# Altium PCB JHDriverBoard.PcbDoc
Units mm, origin at the board's own origin, x right, y up, seen from the top; angles counter-clockwise.
Board outline 96 x 90 mm, 4 copper layers (Top Layer, layer2, layer3, Bottom Layer), stack 0.603 mm thick; 36 components, 36 nets, 212 pads, 65 vias.
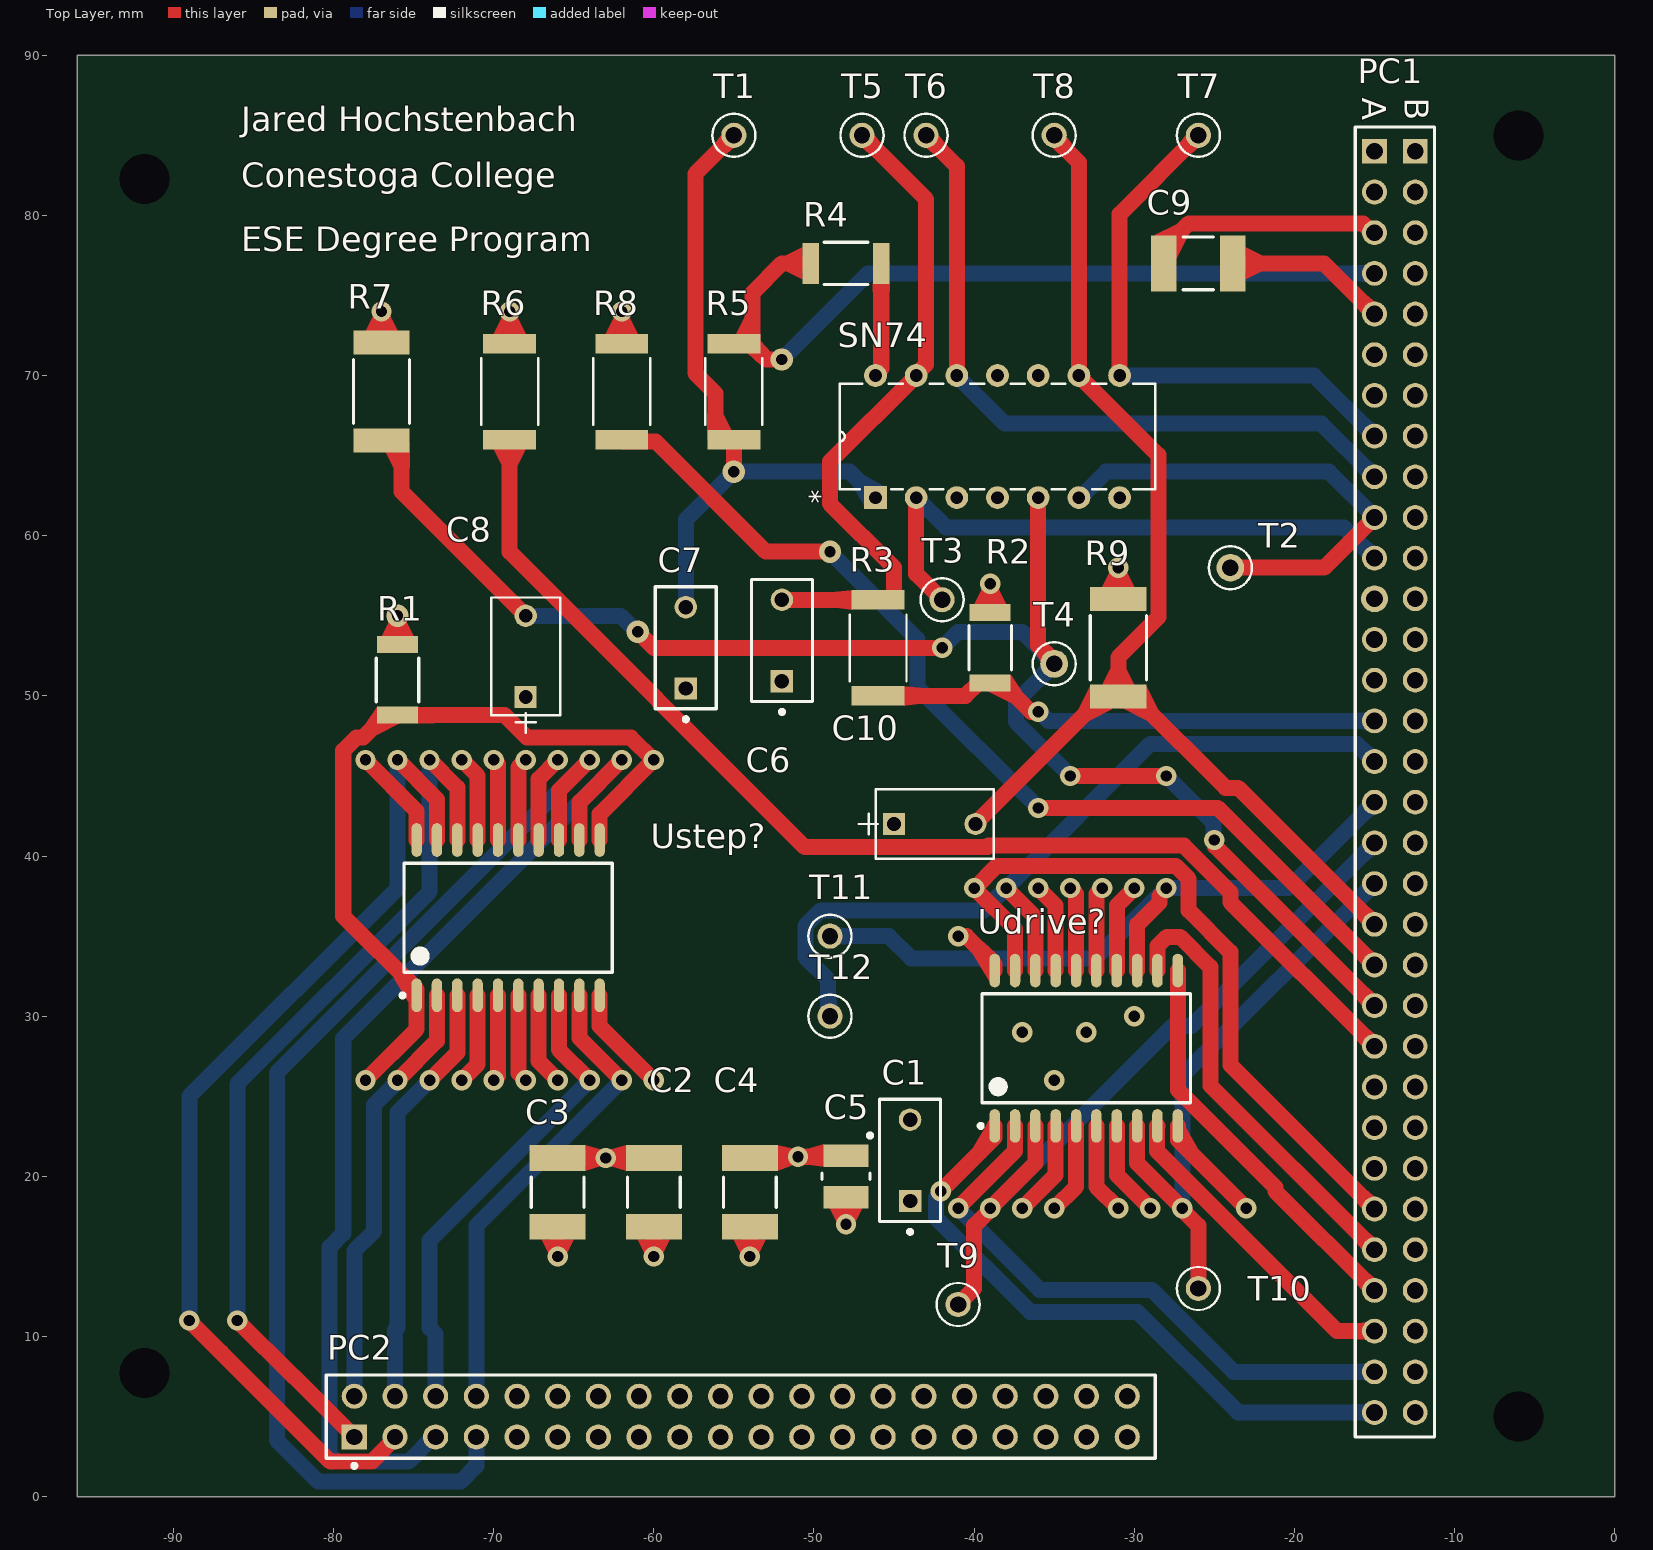
[diagram p0: Top Layer view]
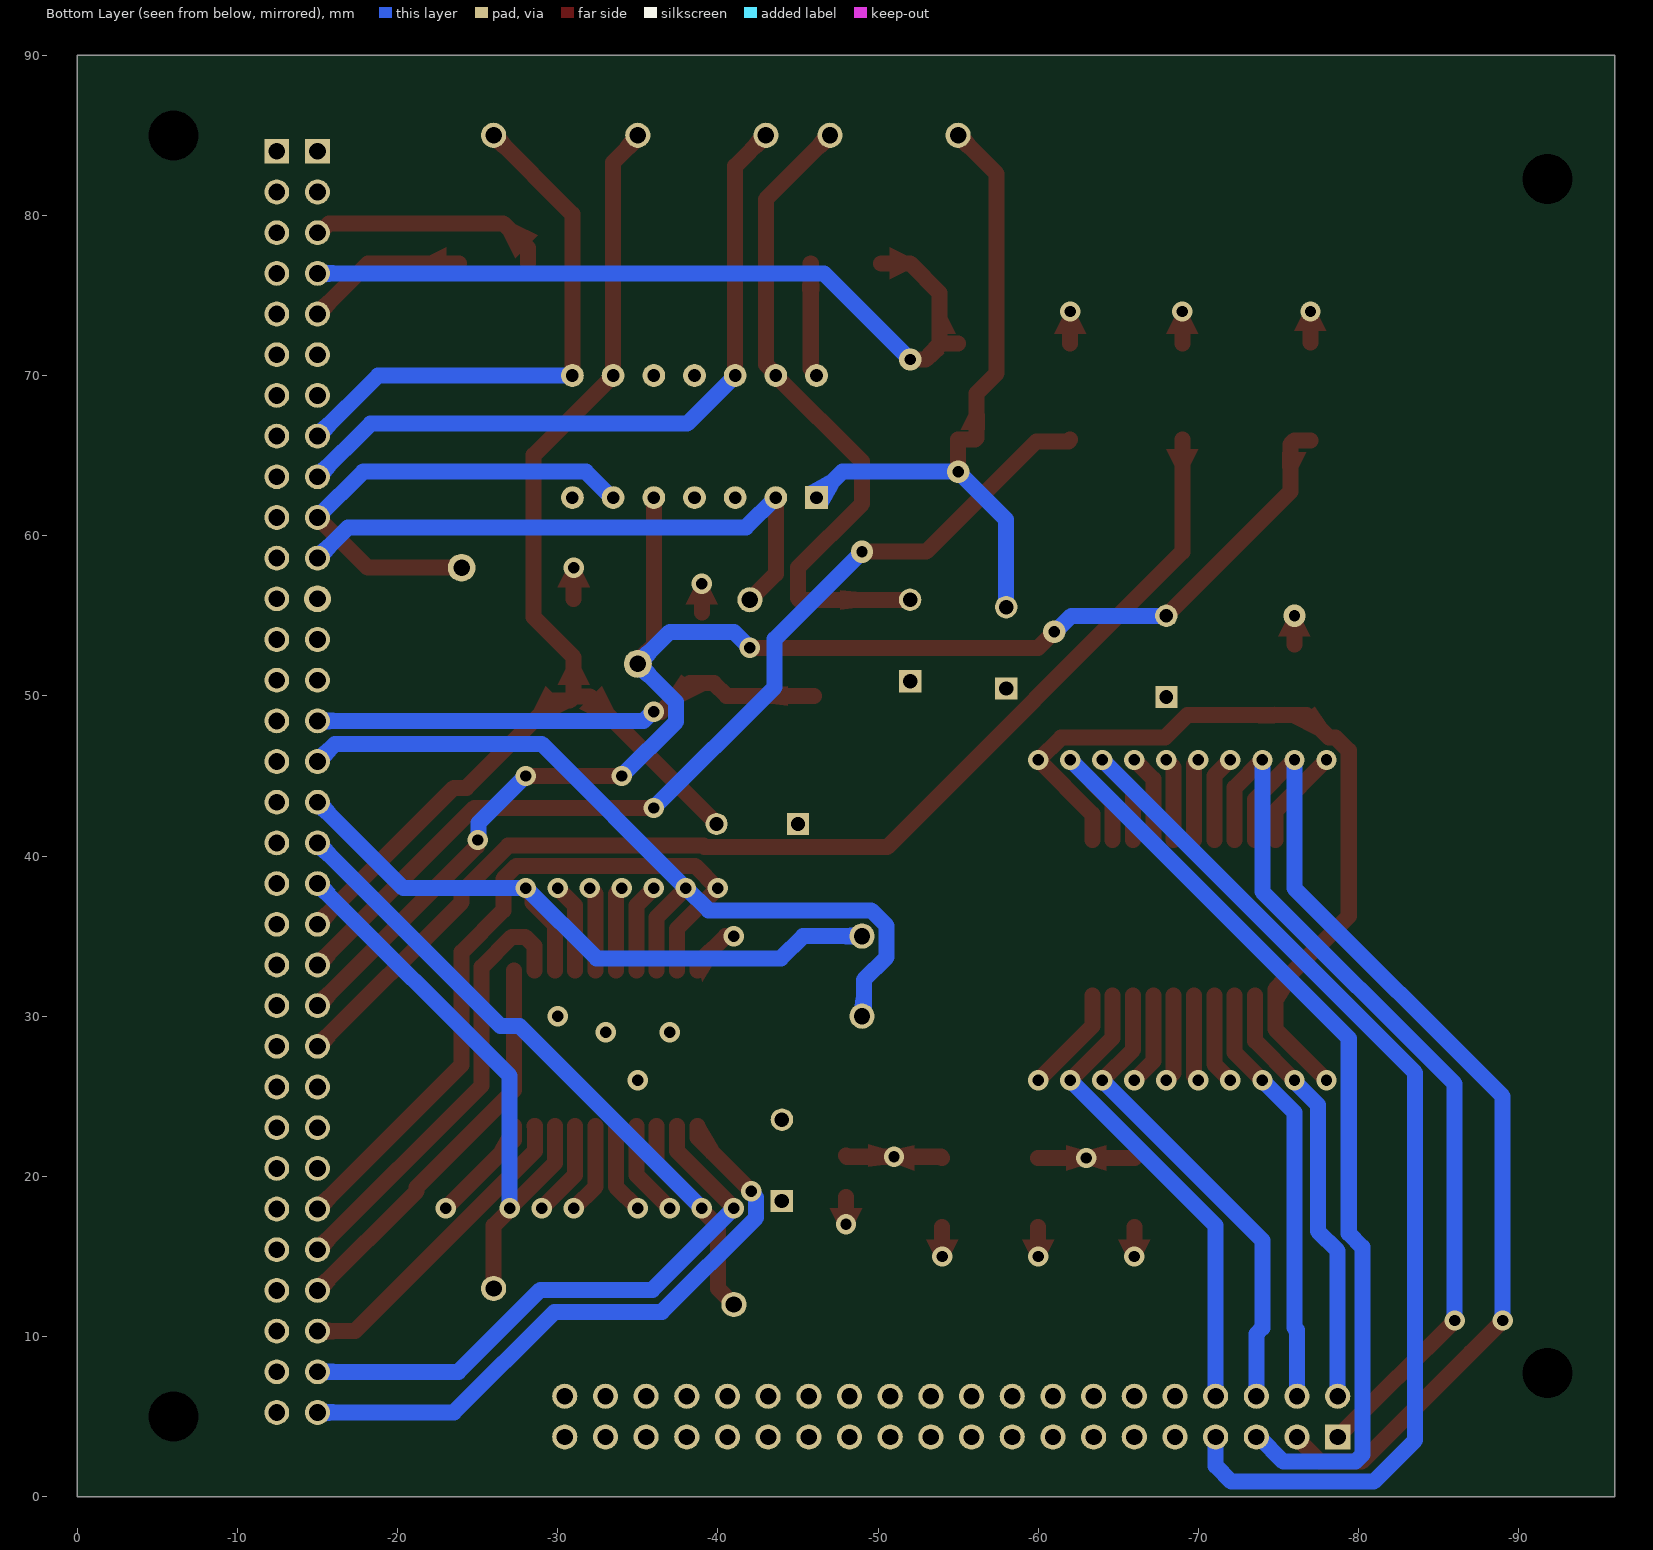
[diagram p1: Bottom Layer view, seen from below]
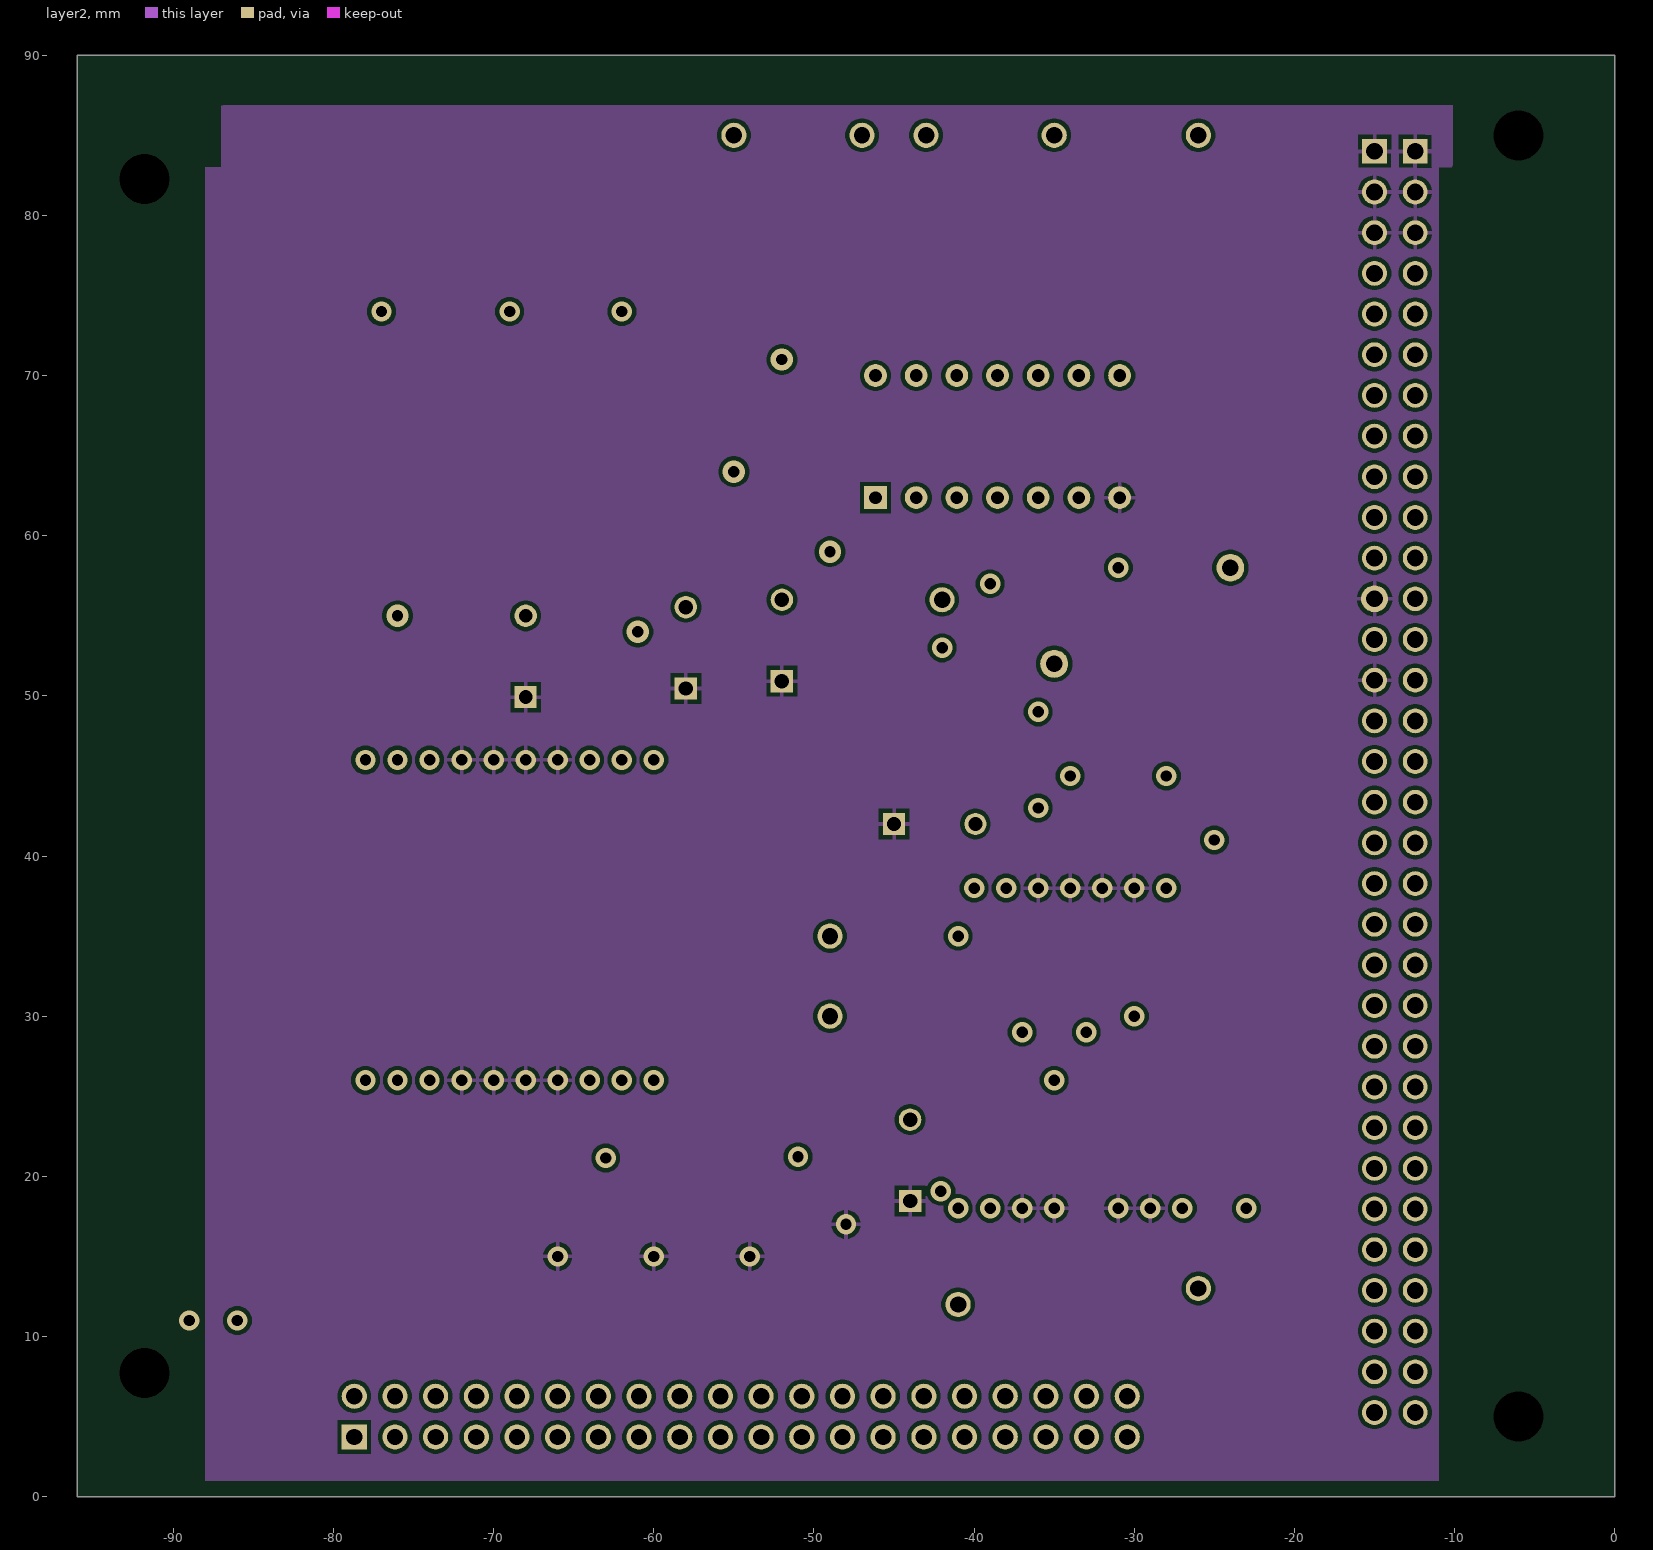
[diagram p2: layer2]
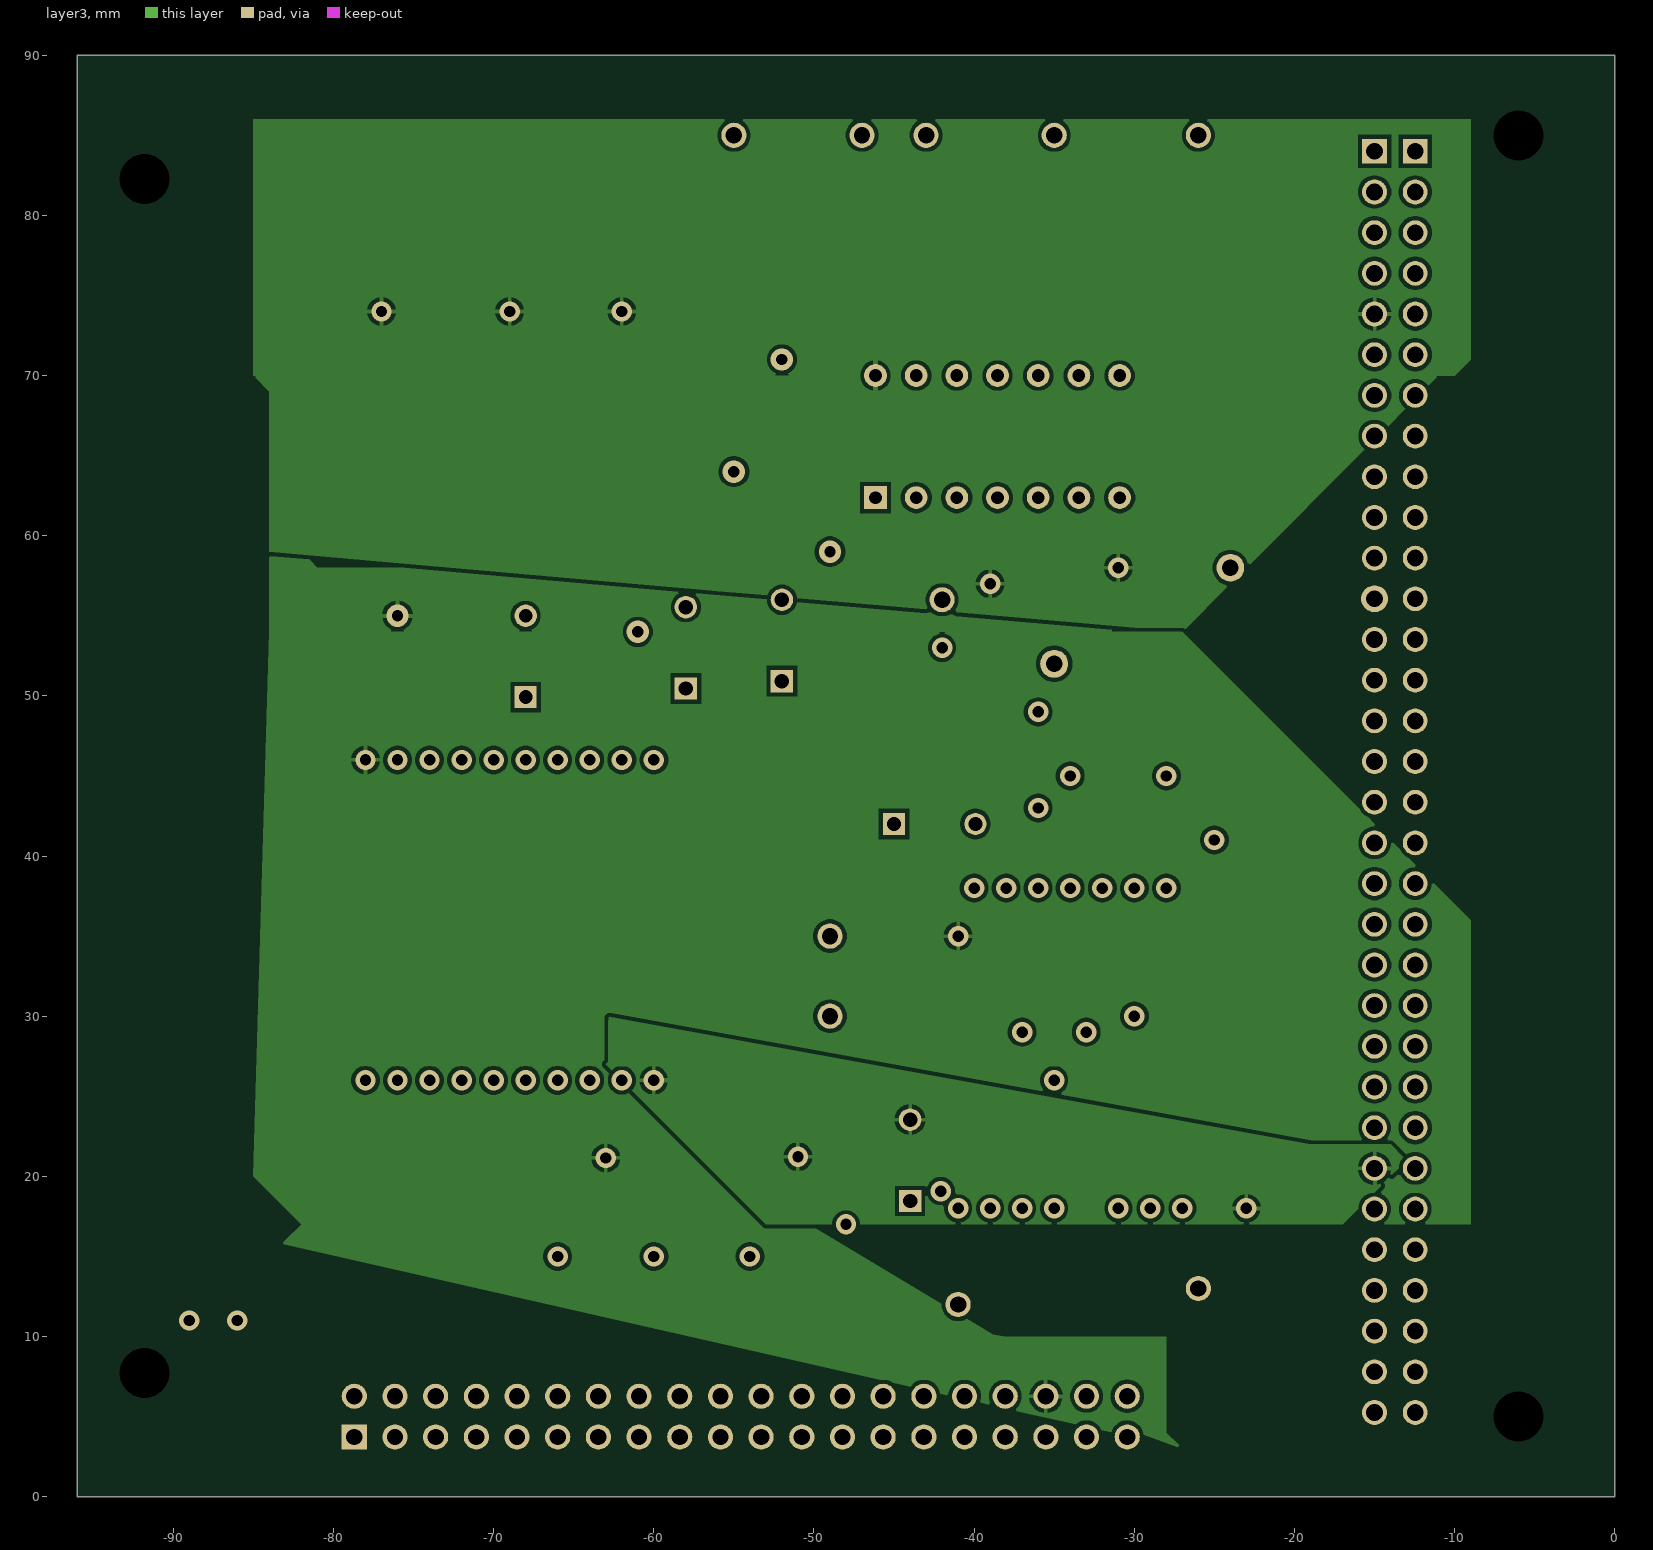
[diagram p3: layer3]
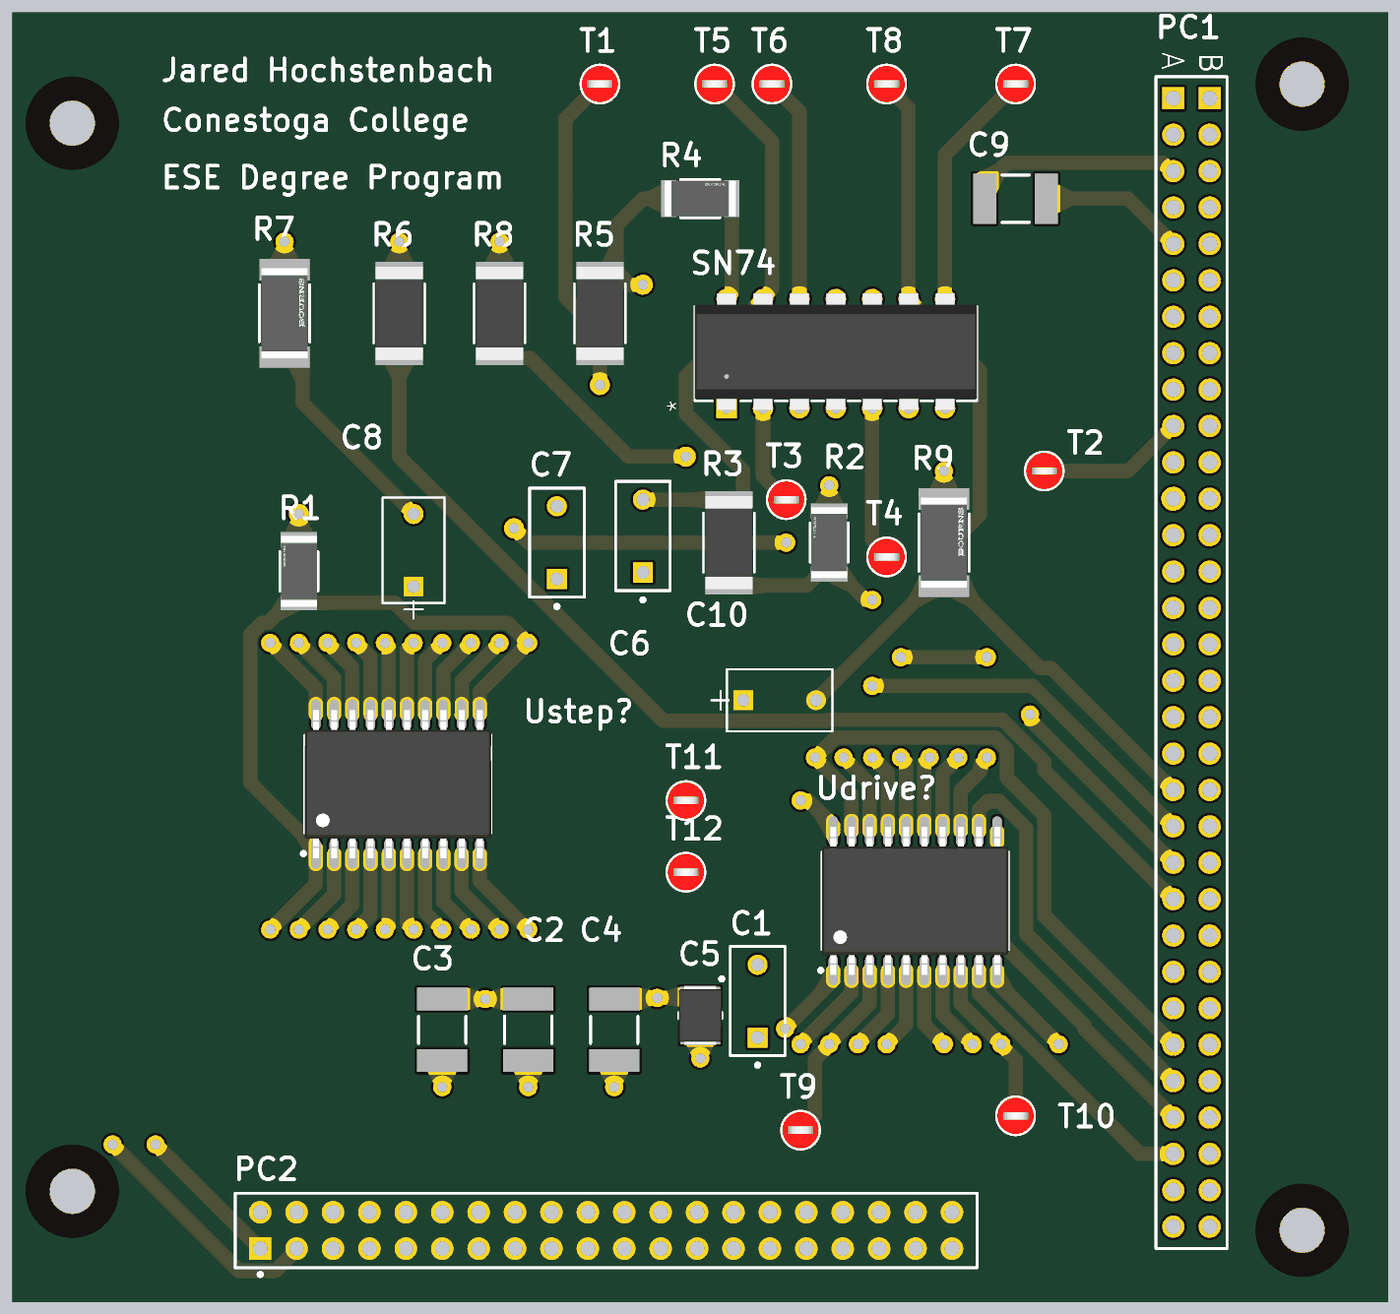
[diagram p4: 3D render of the assembled board from above, using the file's embedded part models]

## Layer stack, top to bottom
Top Solder: solder mask 0.0102, Solder Resist, Dk 3.5
Top Layer: signal copper 0.0356
Dielectric 2: prepreg 0.0711, PP-006, Dk 4.1
layer2: signal copper 0.035
Dielectric 1: dielectric 0.32, FR-4, Dk 4.8
layer3: signal copper 0.035
Dielectric 3: prepreg 0.0711, PP-006, Dk 4.1
Bottom Layer: signal copper 0.0356
Bottom Solder: solder mask 0.0102, Solder Resist, Dk 3.5

## Board outline
-96,0 0,0 0,90 -96,90

## Design rules (kind name [scope] priority, off if disabled: settings)
Clearance [All] p1: gap=0.254 ignorepadtopadclearanceinfootprint=FALSE except(0: Arc-Hole Track-Hole SMDPad-Hole THPad-Hole Via-Hole Fill-Hole Poly-Hole Region-Hole Text-Hole)
HoleSize [All] p1: absolutevalues=TRUE maxlimit=5 minlimit=0.025 maxpercent=80.000 minpercent=20.000
MinimumAnnularRing [All] p1: minimumring=1.397
PlaneClearance [All] p1: clearance=0.61
PlaneConnect [All] p1: planeconnectstyle=Relief reliefexpansion=0.635 reliefentries=4 reliefconductorwidth=0.254 reliefairgap=0.381
PolygonConnect [All] p1: connectstyle=Relief reliefconductorwidth=0.254 reliefentries=4 polygonreliefangle="90 Angle" airgapwidth=0.254
RoomDefinition JHDrivesheet1 [InComponentClass('JHDrivesheet1')] p1: confinementstyle=ConfineIn formatcopy=TRUE lockcomponents=FALSE outline -96,0 0,0 0,90 -96,90
RoomDefinition JHDrivesheet2 [InComponentClass('JHDrivesheet2')] p2: confinementstyle=ConfineIn formatcopy=TRUE lockcomponents=FALSE outline -96.235,0.285 0,0.285 0,90.285 -96.235,90.285
RoutingVias [All] p1: holewidth=0.711 width=2 viastyle="Through Hole" minholewidth=0.711 minwidth=2 maxholewidth=0.711 maxwidth=2
SilkToSolderMaskClearance [IsPad] p1: minsilkscreentomaskgap=0.01 clearancetoexposedcopper=TRUE
SolderMaskExpansion [All] p1: expansion=0.178 istentingtop=FALSE
Width [All] p1: maxlimit=1.27 minlimit=1 preferedwidth=1 minimp=50.000000 maximp=50.000000 favimp=50.000000
26 further rules are at their usual default settings.

## Classes and differential pairs
component class JHDrivesheet2: C1 C2 C3 C4 C5 R1 T9 T10 T11 T12 Udrive? Ustep?
component class JHDrivesheet1: C6 C7 C8 C9 C10 PC1 PC2 R2 R3 R4 R5 R6 R7 R8 R9 SN74 T1 T2 T3 T4 T5 T6 T7 T8

## Components (designator, comment, footprint, x,y, rotation, side; value= is the part's Value field where it differs from the comment)
C1 "C333C105M5U5TA" KEMT-C333C105M5U5TA-2 -44,21 r90 top
C2 "CAP 100nF 50V 1812(4532)" CAPC1812(4532)100_M -60,19 r90 top value=100nF
C3 "CAP 100nF 50V 1812(4532)" CAPC1812(4532)100_M -66,19 r270 top value=100nF
C4 "CAP 100nF 50V 1812(4532)" CAPC1812(4532)100_M -54,19 r90 top value=100nF
C5 "TAJB336K016RNJ" CAPMP3529X21-T_V -48,20 r270 top
C6 "C333C105M5U5TA" KEMT-C333C105M5U5TA-2 -52,53.46 r90 top
C7 "C333C105M5U5TA" KEMT-C333C105M5U5TA-2 -58,53 r90 top
C8 "C330C103KHR5TA" CAP_C330C_MR_COG_KEM#1 -68,49.92 r90 top
C9 "CAP 100nF 50V 1812(4532)" CAPC1812(4532)100_M -26,77 r0 top value=100nF
C10 "C330C103KHR5TA" CAP_C330C_MR_COG_KEM#2 -45,42 r0 top
PC1 "PC104-CN-2P-F-R64" BTB2-54-V64F-04 -15,84 r270 top
PC2 "M20-6102045" FP-M20-6102045-MFG -54.57,5 r0 top
R1 "CR2010-JW-103ELF" FP-CR2010-IPC_C -76,51 r90 top
R2 "CR2010-JW-103ELF" FP-CR2010-IPC_C -39,53 r90 top
R3 "CRM2512-FX-1000ELF" BO_CR2512 -46,53 r270 top
R4 "CR2010-JW-103ELF" FP-CR2010-IPC_C -48,77 r0 top
R5 "CRM2512-FX-1000ELF" BO_CR2512 -55,69 r90 top
R6 "CRM2512-FX-1000ELF" BO_CR2512 -69,69 r270 top
R7 "CR2512-JW-472ELF" FP-CR2512-IPC_A -77,69 r90 top
R8 "CRM2512-FX-1000ELF" BO_CR2512 -62,69 r270 top
R9 "CR2512-JW-472ELF" FP-CR2512-IPC_A -31,53 r90 top
SN74 "SN74HC14N" N14 -30.92,70 r90 top
T1 "5000" FP-5000-MFG#1 -55,85 r0 top
T2 "5000" FP-5000-MFG#2 -24,58 r0 top
T3 "5000" FP-5000-MFG#1 -42,56 r0 top
T4 "5000" FP-5000-MFG#3 -35,52 r0 top
T5 "5000" FP-5000-MFG#1 -47,85 r0 top
T6 "5000" FP-5000-MFG#4 -43,85 r0 top
T7 "5000" FP-5000-MFG#1 -26,85 r0 top
T8 "5000" FP-5000-MFG#1 -35,85 r0 top
T9 "5000" FP-5000-MFG#1 -41,12 r0 top
T10 "5000" FP-5000-MFG#1 -26,13 r0 top
T11 "5000" FP-5000-MFG#1 -49,35 r0 top
T12 "5000" FP-5000-MFG#1 -49,30 r0 top
Udrive? "L293DD" STM-SOIC-20_M -33,28 r90 top
Ustep? "L293DD" STM-SOIC-20_M -69.095,36.15 r90 top

## Footprints (in the part's own frame and the unit in brackets; to place one, negate y for a bottom-side part, rotate by r counter-clockwise, add the part's x,y. Pads: shape width x height; smd on the part's side, far side on the other; paste and mask are expansions set on the pad)
BO_CR2512 [mil]
  rect 48x130 smd paste+0 mask+0: 1(-118,0) 2(118,0)
  silkscreen extent -82,-70 82,70, body extent -128,-65 128,65, height 30
BTB2-54-V64F-04 [mm] "Board-to-Board Connector, PC104 BA ISA, Stackthrough, Vertical, 2-Row, 64-Postion, Pitch 2.54mm,  Receptacle , Height 11.05mm"
  rect 1.55x1.55 hole 1.05: A1(0,0) B1(0,2.54)
  round 1.55 hole 1.05: A2(2.54,0) A3(5.08,0) A4(7.62,0) A5(10.16,0) A6(12.7,0) A7(15.24,0) A8(17.78,0) A9(20.32,0) A10(22.86,0) A11(25.4,0) A13(30.48,0) A14(33.02,0) A15(35.56,0) A16(38.1,0) A17(40.64,0) A18(43.18,0) A19(45.72,0) A20(48.26,0) A21(50.8,0) A22(53.34,0) A23(55.88,0) A24(58.42,0) A25(60.96,0) A26(63.5,0) A27(66.04,0) A28(68.58,0) A29(71.12,0) A30(73.66,0) A31(76.2,0) A32(78.74,0) B2(2.54,2.54) B3(5.08,2.54) B4(7.62,2.54) B5(10.16,2.54) B6(12.7,2.54) B7(15.24,2.54) B8(17.78,2.54) B9(20.32,2.54) B10(22.86,2.54) B11(25.4,2.54) B12(27.94,2.54) B13(30.48,2.54) B14(33.02,2.54) B15(35.56,2.54) B16(38.1,2.54) B17(40.64,2.54) B18(43.18,2.54) B19(45.72,2.54) B20(48.26,2.54) B21(50.8,2.54) B22(53.34,2.54) B23(55.88,2.54) B24(58.42,2.54) B25(60.96,2.54) B26(63.5,2.54) B27(66.04,2.54) B28(68.58,2.54) B29(71.12,2.54) B30(73.66,2.54) B31(76.2,2.54) B32(78.74,2.54)
  round 1.677 hole 1.05: A12(27.94,0)
  silkscreen extent -1.52,-1.2 80.27,3.75, body extent -1.6,-1.2 80.34,3.75, height 11.05
CAP_C330C_MR_COG_KEM#1 [mil]
  rect 54x54 hole 34 mask+0: 1(0,0)
  round 55 hole 34 paste+0: 2(200,0)
  silkscreen extent -87,-85 245,85, body extent 0,0 10,10, height 10
CAP_C330C_MR_COG_KEM#2 [mil]
  rect 54x54 hole 34 mask+0: 1(0,0)
  round 54 hole 34 mask+0: 2(200,0)
  silkscreen extent -87,-85 245,85, body extent 0,0 10,10, height 10
CAPC1812(4532)100_M [mm] "Chip Capacitor, Body 4.5x3.2mm, Height 1mm, IPC Low Density"
  rect 1.6x3.5 smd: 1(-2.15,0) 2(2.15,0)
  silkscreen extent -0.95,-1.65 0.95,1.65, body extent -2.4,-1.7 2.4,1.7, height 1
CAPMP3529X21-T_V [mm] "Molded Capacitor, 2-Leads, Body 3.70x3mm"
  rect 1.4x2.8 smd: 1(-1.3,0) 2(1.3,0)
  silkscreen extent -2.67,-1.5 0.2,1.63, body extent -2.07,-1.5 2.07,1.5, height 2.1
FP-5000-MFG#1 [mm]
  round 1.57 hole 1.02 paste-1000 mask+0: 1(0,0)
  silkscreen extent -1.35,-1.34 1.35,1.34, body extent -1.45,-1.45 1.45,1.45, height 0.25
FP-5000-MFG#2 [mm]
  round 1.727 hole 1.02 paste-1000 mask+0: 1(0,0)
  silkscreen extent -1.35,-1.34 1.35,1.34, body extent -1.45,-1.45 1.45,1.45, height 0.25
FP-5000-MFG#3 [mm]
  round 1.748 hole 1.02 paste-1000 mask+0: 1(0,0)
  silkscreen extent -1.35,-1.34 1.35,1.34, body extent -1.45,-1.45 1.45,1.45, height 0.25
FP-5000-MFG#4 [mm]
  round 1.57 hole 1.02 paste-1000: 1(0,0)
  silkscreen extent -1.35,-1.34 1.35,1.34, body extent -1.45,-1.45 1.45,1.45, height 0.25
FP-CR2010-IPC_C [mm]
  rect 1.056x2.558 smd paste+0 mask+0: 1(-2.201,0) 2(2.201,0)
  silkscreen extent -1.37,-1.33 1.37,1.33, body extent -2.83,-1.43 2.83,1.43, height 0.25
FP-CR2512-IPC_A [mm]
  rect 1.505x3.506 smd paste+0 mask+0: 1(-3.051,0) 2(3.051,0)
  silkscreen extent -2,-1.75 2,1.75, body extent -4.3,-2.25 4.3,2.25, height 0.25
FP-M20-6102045-MFG [mm]
  rect 1.57x1.57 hole 1.02 paste-1000 mask+0: 1(-24.13,-1.27)
  round 1.57 hole 1.02 paste-1000 mask+0: 2(-24.13,1.27) 3(-21.59,-1.27) 4(-21.59,1.27) 5(-19.05,-1.27) 6(-19.05,1.27) 7(-16.51,-1.27) 8(-16.51,1.27) 9(-13.97,-1.27) 10(-13.97,1.27) 11(-11.43,-1.27) 12(-11.43,1.27) 13(-8.89,-1.27) 14(-8.89,1.27) 15(-6.35,-1.27) 16(-6.35,1.27) 17(-3.81,-1.27) 18(-3.81,1.27) 19(-1.27,-1.27) 20(-1.27,1.27) 21(1.27,-1.27) 22(1.27,1.27) 23(3.81,-1.27) 24(3.81,1.27) 25(6.35,-1.27) 26(6.35,1.27) 27(8.89,-1.27) 28(8.89,1.27) 29(11.43,-1.27) 30(11.43,1.27) 31(13.97,-1.27) 32(13.97,1.27) 33(16.51,-1.27) 34(16.51,1.27) 35(19.05,-1.27) 36(19.05,1.27) 37(21.59,-1.27) 38(21.59,1.27) 39(24.13,-1.27) 40(24.13,1.27)
  silkscreen extent -25.88,-3.19 25.88,2.6
KEMT-C333C105M5U5TA-2 [mm] "TH, 2-Leads, Body 7.62x3.81mm"
  rect 1.4x1.4 hole 0.9: 1(-2.54,0)
  round 1.4 hole 0.9: 2(2.54,0)
  silkscreen extent -4.58,-1.91 3.81,1.91, body extent -3.81,-1.91 3.81,1.91, height 9.91
N14 [mil]
  rect 56x56 hole 31: 1(-300,600)
  round 56 hole 31: 2(-300,500) 3(-300,400) 4(-300,300) 5(-300,200) 6(-300,100) 7(-300,0) 8(0,0) 9(0,100) 10(0,200) 11(0,300) 12(0,400) 13(0,500) 14(0,600)
  silkscreen extent -280,-88 -20,688, body extent -305,-87 15,687, height 205
STM-SOIC-20_M [mm] "SOIC, 20-Leads, Body 13x7.6mm, Pitch 1.27mm, IPC Low Density"
  oval 2.1x0.65 smd: 1(-4.85,5.715) 2(-4.85,4.445) 3(-4.85,3.175) 4(-4.85,1.905) 5(-4.85,0.635) 6(-4.85,-0.635) 7(-4.85,-1.905) 8(-4.85,-3.175) 9(-4.85,-4.445) 10(-4.85,-5.715) 11(4.85,-5.715) 12(4.85,-4.445) 13(4.85,-3.175) 14(4.85,-1.905) 15(4.85,-0.635) 16(4.85,0.635) 17(4.85,1.905) 18(4.85,3.175) 19(4.85,4.445) 20(4.85,5.715)
  silkscreen extent -4.97,-6.5 3.4,6.71, body extent -5.16,-6.5 5.16,6.5, height 2.65

## Part data
C1 C6 C7: library part CMP-2000-05174-1, "Multilayer Ceramic Capacitor / Axial and Radial Leaded, 1 uF, +/- 20%, 10 to 85 degC, 2-Pin THD, RoHS, Bulk", Capacitance=1uF, Case Height=3.81mm, Case Length=9.91mm, Case Style=ConformallyCoated, Case Width=7.62mm, Manufacturer=Kemet, Maximum Operating Temperature=+125C, Minimum Operating Temperature=-55C, Operating Temperature Range=-55Cto+125C, Temperature Coefficient / Code=Z5U, Tolerance=20%, Voltage Rating=50V, Brand=Kemet, Datasheet URL=http://www.farnell.com/datasheets/706880.pdf, Datasheet Version=Jul-09, Dimensions=7.62mmWx9.91mmLx3.81mmH, Dissipation Factor DF=4, Factory Pack Quantity=250, Lead Diameter=0.51mm, Lead Spacing=5.08mm, Lead Style=InsideBend, Manufacturer URL=http://www.kemet.com/, Packaging=Bulk, Product=GeneralTypeMLCCs, Product Category=MultilayerCeramicCapacitorsMLCC-Leaded, RoHS=Details, Series=C333, Termination Style=Radial, Type=RadialLeads, Voltage Rating DC=50V
C2 C3 C4 C9: library part CMP-1040-01293-1, "CAP 100nF 50V ±20% 1812 (4532 Metric) Thickness 1mm SMD", Case-EIA=1812, Case-Metric=4532, Rated Voltage="50 V", Tolerance=Â±20%, Max Thickness="1 mm", Technology=SMT
C5: library part CMP-2000-07224-1, "Standard Tantalum, 33 uF, +/- 10%, 16 V, -55 to 125 degC, 2-Pin SMD, RoHS, Tape and Reel", Capacitance=33µF, ESR (Equivalent Series Resistance)=2.1Ohm, Lifetime @ Temp.=-, Manufacturer=AVX, Manufacturer Size Code=B, Operating Temperature=-55°C~125°C, Package / Case=1210(3528Metric), Package Description="2-Pin Surface Mount Device, Body 3.5 x 2.85 mm", Package Reference=CAPMP3529X21-T, PCN Part Number=TAJSeriesSuffix08/Dec/2008, Standard Package=1, Tolerance=±10%, Voltage - Rated=16V, Catalog Drawings=TAJSeriesSideTAJSeries, Category=Capacitors, Datasheet URL=http://datasheets.avx.com/TAJ.pdf, Datasheet Version=02/2016, EDA / CAD Models=DownloadfromAcceleratedDesigns, Family=TantalumCapacitors, Features=GeneralPurpose, Height - Seated (Max)="0.083\"(2.10mm)", Kits=478-3443-ND-KITTANTCAPTAJSERIES, Lead Spacing=-, Manufacturer URL=http://www.avx.com/, Mounting Technology=SurfaceMount, Mounting Type=SurfaceMount, Online Catalog=TAJSeries, Other Names=478-1688-1, Package URL=http://www.avx.com/download/software/literature/AVX-Footprint-Library.pdf, Packaging=CutTape(CT), Product Training Modules=ComponentSolutionsforSmartMeterApplications, Series=TAJ, Size / Dimension="0.138\"Lx0.110\"W(3.50mmx2.80mm)", Type=Molded
C8 C10: "No Description Available", Mfr_Name=Kemet, Copyright="Copyright (C) 2023 Ultra Librarian. All rights reserved.", Manufacturer_Part_Number=C330C103KHR5TA, RefDes=RefDes, Type=DEV
PC1: library part CMP-0001-00110-1, "Board-to-Board Connector, PC104 BA ISA, Stackthrough, Vertical, 2-Row, 64-Postion, Pitch 2.54mm,  Receptacle, Height 11.05mm", Package Reference=BTB2-54-V64F-04, ClassName="Board Template Connector", Mating Connector="Harwin-M20-6103205 (stackthrough)", Publisher=Altium
PC2: library part CMP-15831-000080-1, "CONN STKTHRU PC/104 40POS PCB", Color=Black, Contact Resistance=30mR, Current Rating=3A, Flammability Rating="UL94 V-0", Insulation Resistance=5GR, Max Operating Temperature=105°C, Min Operating Temperature=-55°C, Package Quantity=11, Contact Material=Bronze, Contact Plating=Gold, Depth=5.25mm, Gender=Receptacle, Housing Color=Black, Housing Material=Nylon, Length=51.46mm, Material=Nylon, Max Current Rating=3A, Mount="Through Hole", Number of Contacts=40, Number of Positions=40, Number of Rows=2, Orientation=Straight, Packaging=Rail/Tube, Pitch=2.54mm, Radiation Hardening=No, REACH SVHC="No SVHC", Series=M20, Termination=Solder, Weight=0.218205oz
R1 R2 R4: library part CMP-07231-003456-1, "Thick Film Chip Resistors 2010 10kΩ 0.5W 5% 200ppm/°C", Case Code (Imperial)=2010, Case Code (Metric)=5025, Max Operating Temperature=155°C, Min Operating Temperature=-55°C, Package Quantity=4000, Power Rating=500mW, Resistance=10kR, Temperature Coefficient=200ppm/°C, Tolerance=5%, Voltage Rating=200V, Case/Package=2010, Composition="Thick Film", Contact Plating=Tin, Height=0.6mm, Length=5mm, Mount="Surface Mount", Packaging="Tape and Reel", Radiation Hardening=No, Termination=SMD/SMT, Width=2.5mm
R3 R5 R6 R8: "No Description Available", Mfr_Name="Bourns Electronics", Copyright="Copyright (C) 2023 Ultra Librarian. All rights reserved.", Manufacturer_Part_Number=CRM2512-FX-1000ELF, RefDes=RefDes, Type=DEV
R7 R9: library part CMP-1018-00090-2, "Thick Film Chip Resistors 2512 4.7kΩ 1W 5% 200ppm/°C", Case Code (Imperial)=2512, Case Code (Metric)=6332, Max Operating Temperature=155°C, Max Power Dissipation=1W, Min Operating Temperature=-55°C, Package Quantity=4000, Resistance=4.7kR, Resistor Type="Thick Film", Temperature Coefficient=200ppm/°C, Tolerance=5%, Voltage Rating=200V, Case/Package=2512, Height=0.03inch, Length=0.248inch, Mount="Surface Mount", Number of Terminations=2, Packaging="Tape and Reel", Power Rating=1W, RoHS Compliant=Yes, Series=CR2512, Termination=SMD/SMT, Width=0.122inch
SN74: "No Description Available", Mfr_Name="Texas Instruments", Copyright="Copyright (C) 2023 Ultra Librarian. All rights reserved.", Manufacturer_Part_Number=SN74HC14N, RefDes=RefDes, Type=DEV
T1 T2 T3 T4 T5 T6 T7 T8 T9 T10 T11 T12: library part CMP-19636-000027-1, "PC TEST POINT MINIATURE RED", Color=Red, Flammability Rating="UL94 V-0", Package Quantity=100, Body Material=Bronze, Contact Material=Bronze, Contact Plating=Tin, Height=0.3inch, Hole Diameter=1.6mm, Housing Color=Red, Inside Diameter=1.27mm, Insulation=Insulated, Lead Free="Lead Free", Length=7.62mm, Material=Nylon, Mount=PCB, Number of Contacts=1, Number of Ports=1, Orientation=Straight, Outside Diameter=2.54mm, Packaging=Bulk, Plating=Silver, REACH SVHC="No SVHC", RoHS Compliant=Yes, Series=THM
Udrive? Ustep?: library part CMP-1771-00003-1, "Push-Pull Four Channel Driver with Diodes, 4.5 to 36 V, 20-Pin SOIC, RoHS, Tube", Case Code (Imperial)=0603, Case Code (Metric)=1608, Max Operating Temperature="155 degC", Min Operating Temperature="-55 degC", Package Quantity=5000, Power Rating="100 mW", Resistance="15 kohm", Tolerance=1%, Voltage Rating="50 V", Case\Package=0603, ComponentLink1Description="Manufacturer URL", ComponentLink1URL=http://www.st.com/, ComponentLink2Description=Datasheet, ComponentLink2URL=http://www.st.com/content/ccc/resource/technical/document/datasheet/04/ac/22/f9/20/5d/43/a1/CD00000059.pdf/files/CD00000059.pdf/jcr:content/translations/en.CD00000059.pdf, DatasheetVersion=Jul-03, Height="0.45 mm", Length="1.6 mm", Mount="Surface Mount", PackageDescription="20-Pin Small Outline Integrated Circuit, Body 12.8 x 7.5 mm, Pitch 1.27 mm", PackageReference=SOIC-20, Packaging="Tape and Reel", REACH SVHC=Unknown, RoHSCompliant=true, Width="0.8 mm"

## Free pads (board coordinates)
  round 1.524 hole 3.12 mask+2.5: 1(-91.81,7.735) 4(-6.01,5.01) 4(-6.01,84.99) q(-91.81,82.265)

## Via types
v1: diameter 1.27, hole 0.711, Top Layer to Bottom Layer, 60 vias
v2: diameter 1.397, hole 0.711, Top Layer to Bottom Layer, 5 vias

## Nets (pads, with @x,y where several pads share a name; then routed paths per layer and width w, separated by ;. In a path a pad name is that pad's centre, name@x,y a point inside that pad or via, vN(x,y) a via of type N, cw(c..) or ccw(c..) an arc to the next point about the centre after c; other vN are vias at no path point)
3.3V: C9.2 PC1.A5 R2.2 R4.2 R6.1 R7.2 R8.1 R9.2 SN74.14 | length 27
  Top Layer w1: R7.2 v1(-77,74) ; R6.1 v1(-69,74) ; R8.1 v1(-62,74) ; SN74.14 -46.16,70.08 -45.799,70.441 R4.2 ; R2.2 v1(-39,57) ; R9.2 v1(-31,58) ; C9.2 -18.16,77 PC1.A5
+5: C2.2 C3.1 PC2.36 R1.2 Udrive?.20 Ustep?.20 | length 17.5
  Top Layer w1: v1(-78,46) -74.81,42.81 Ustep?.20 ; R1.2 v2(-76,55) ; C3.1 C2.2 ; v1(-41,35) -40.49,35 -38.715,33.225 Udrive?.20
  other v1: -63,21.15
+BAT: C1.2 C4.2 C5.1 PC1.A26 Udrive?.10 Ustep?.10 | length 19.7
  Top Layer w1: Ustep?.10 -63.396,31.284 -63.396,29.396 v1(-60,26) ; C4.2 -53.925,21.225 -48.075,21.225 C5.1 ; Udrive?.10 -27.285,22.285 v1(-23,18)
  other v1: -51,21.225
DR1: PC1.A31 Udrive?.2 | length 36.8
  Top Layer w1: v1(-41,18) -41,18.036 -37.461,21.575 -37.461,23.134 Udrive?.2
  Bottom Layer w1: v1(-41,18) -35.917,12.917 -28.917,12.917 -23.8,7.8 PC1.A31
DR2: PC1.A30 Udrive?.9 | length 19.8
  Top Layer w1: Udrive?.9 -28.571,23.134 -28.571,21.571 -17.34,10.34 PC1.A30
DR3: PC1.A28 Udrive?.12 | length 27.7
  Top Layer w1: Udrive?.12 -28.555,34.371 -27.969,34.957 -27.141,34.957 -25.254,33.07 -25.254,25.674 PC1.A28
DR4: PC1.A27 Udrive?.19 | length 45.9
  Top Layer w1: Udrive?.19 -37.445,35.445 v1(-40,38) -39.964,38 -38.575,39.389 -27.425,39.389 -26.611,38.575 -26.611,36.611 -24,34 -24,26.96 PC1.A27
DR5: PC1.A32 Udrive?.1 | length 39.7
  Top Layer w1: v1(-42.078,19.078) -38.715,22.44 Udrive?.1
  Bottom Layer w1: v1(-42.078,19.078) -42.078,19.005 -42.389,18.693 -42.389,17.425 -36.503,11.539 -29.803,11.539 -23.524,5.26 PC1.A32
DR6: PC1.A29 Udrive?.11 | length 25.1
  Top Layer w1: Udrive?.11 -27.285,25.401 -21.195,19.311 -21.195,19.075 PC1.A29
E12: PC1.A21 R8.2 | length 62.3
  Top Layer w1: R8.2 -61.89,65.893 -59.893,65.893 -53,59 v2(-49,59) ; v1(-36,43) -24.8,43 PC1.A21
  Bottom Layer w1: v2(-49,59) -43.539,53.539 -43.539,50.539 v1(-36,43)
E13: C10.2 PC1.A20 R9.1 SN74.9 T8.1 | length 72.9
  Top Layer w1: C10.2 -39.92,42.03 -32.001,49.949 R9.1 ; T8.1 -35,84.849 -33.46,83.309 SN74.9 -28.493,65.033 -28.493,54.912 -31,52.405 R9.1 ; PC1.A20 -23.514,44.254 -24.304,44.254 -29.747,49.697 -30.748,49.697 R9.1
E22: PC1.A23 R6.2 | length 74.2
  Top Layer w1: R6.2 -69,58.994 -50.567,40.56 -39.178,40.56 -39.095,40.643 -26.905,40.643 -23.996,37.733 -23.996,37.116 PC1.A23
E23: C8.2 PC1.A22 R7.1 SN74.5 T4.1 | length 96.3
  Top Layer w1: R7.1 -75.999,65.949 -75.747,65.697 -75.747,62.747 C8.2 ; v2(-61,54) -60,53 v1(-42,53) ; SN74.5 -36,53.154 -35,52.154 T4.1 ; v1(-34,45) v1(-28,45) v1@-27.986,44.986 ; v1(-25,41) -24.948,40.948 -24.948,40.608 PC1.A22
  Bottom Layer w1: C8.2 -62.073,55 -61.073,54 v2(-61,54) ; v1(-42,53) -41,54 -37,54 T4.1 -37.389,49.611 -37.389,48.389 v1(-34,45) ; v1(-28,45) -25.052,42.052 -25.052,41.052 v1(-25,41)
GND: C1.1 C2.1 C3.2 C4.1 C5.2 C6.1 C7.1 C8.1 C9.1 C10.1 PC1.A1 PC1.A2 PC1.A3 PC1.A12 PC1.A14 PC1.B1 PC1.B2 PC1.B3 SN74.7 Udrive?.4 Udrive?.5 Udrive?.6 Udrive?.7 Udrive?.14 Udrive?.15 Udrive?.16 Udrive?.17 Ustep?.4 Ustep?.5 Ustep?.6 Ustep?.7 Ustep?.14 Ustep?.15 Ustep?.16 Ustep?.17 | length 111.1
  Top Layer w1: v1(-72,26) -71,27 Ustep?.4 ; v1(-72,46) -71,45 Ustep?.17 ; v1(-70,26) -69.73,26.27 Ustep?.5 ; v1(-70,46) -69.73,45.73 Ustep?.16 ; Ustep?.6 -68.46,26.46 v1(-68,26) ; Ustep?.15 -68.46,45.54 v1(-68,46) ; Ustep?.7 -67.19,27.19 v1(-66,26) ; Ustep?.14 -67.19,44.81 v1(-66,46) ; v1(-66,15) C3.2 ; v1(-60,15) C2.1 ; v1(-54,15) C4.1 ; v1(-48,17) C5.2 ; v1(-37,18) -34.905,20.095 Udrive?.4 ; v1(-36,38) -34.905,36.905 Udrive?.17 ; v1(-35,18) -33.635,19.365 Udrive?.5 ; v1(-34,38) -33.635,37.635 Udrive?.16 ; Udrive?.6 -32.365,19.365 v1(-31,18) ; Udrive?.15 -32.365,37.635 v1(-32,38) ; Udrive?.7 -31.095,20.095 v1(-29,18) ; Udrive?.14 -31.095,36.905 v1(-30,38) ; C9.1 -28.15,77.95 -26.596,79.504 -15.733,79.504 -15.149,78.92 PC1.A3
LP1: PC1.A15 R2.1 R3.2 | length 32.3
  Top Layer w1: R3.2 -40.547,50.003 -39.751,50.799 R2.1 -38.249,50.799 -36.45,49 v1(-36,49)
  Bottom Layer w1: v1(-36,49) -35.927,49 -35.367,48.44 PC1.A15
LP2: PC1.A4 R4.1 R5.2 | length 50.3
  Top Layer w1: R5.2 R5.2@-53.959,71.997 ; v2(-52,71) -52.961,71 R5.2@-53.959,71.997 ; R4.1 -52,77 -53.849,75.151 -53.849,72.107 R5.2@-53.959,71.997
  Bottom Layer w1: v2(-52,71) -46.62,76.38 PC1.A4
ML1: PC1.A18 T9.1 Udrive?.3 | length 46.6
  Top Layer w1: T9.1 -40,13 -40,16.927 -39,17.927 v1(-39,18) -36.175,20.825 Udrive?.3
  Bottom Layer w1: v1(-39,18) -27.607,29.393 -26.427,29.393 PC1.A18
ML2: PC1.A19 T10.1 Udrive?.8 | length 37
  Top Layer w1: Udrive?.8 -29.825,20.825 v1(-27,18) -27,17.927 -26,16.927 T10.1
  Bottom Layer w1: v1(-27,18) -27,26.28 PC1.A19
MR1: PC1.A17 T11.1 Udrive?.13 | length 44.5
  Top Layer w1: Udrive?.13 -29.825,35.71 -28.441,37.094 -28.441,37.486 -28,37.927 v1(-28,38)
  Bottom Layer w1: T11.1 -45.33,35 -43.941,33.611 -32.425,33.611 -28.036,38 -20.36,38 PC1.A17
MR2: PC1.A16 T12.1 Udrive?.18 | length 52.9
  Top Layer w1: v1(-38,38) -36.175,36.175 Udrive?.18
  Bottom Layer w1: T12.1 -49.109,30.109 -49.109,32.263 -50.539,33.693 -50.539,35.637 -49.565,36.611 -39.425,36.611 -38.036,38 v1(-38,38) -29,47 -16.1,47 PC1.A16
NetC6_2: C6.2 R3.1 SN74.13 T5.1 | length 41.7
  Top Layer w1: C6.2 C6.2 -46.001,55.999 R3.1 -45.11,55.997 -45,56.107 -45,58 -49,62 -49,64.62 SN74.13 -43.62,70.08 -43,70.7 -43,81 T5.1
NetC7_2: C7.2 R5.1 SN74.1 T1.1 | length 42.8
  Top Layer w1: v2(-55,64) R5.1 -56.041,66.003 -56.151,66.112 -56.151,68.889 -57.405,70.143 -57.405,82.595 T1.1
  Bottom Layer w1: C7.2 -58,61 v2(-55,64) -47.78,64 SN74.1
NetPC1_A8: PC1.A8 SN74.8 T7.1 | length 34.5
  Top Layer w1: SN74.8 -30.92,80.08 T7.1
  Bottom Layer w1: SN74.8 -18.78,70 PC1.A8
NetPC1_A9: PC1.A9 SN74.12 T6.1 | length 44.5
  Top Layer w1: T6.1 -41.08,83.08 SN74.12
  Bottom Layer w1: SN74.12 -38.08,67 -18.32,67 PC1.A9
NetPC1_A10: PC1.A10 SN74.6 T2.1 | length 30.6
  Top Layer w1: T2.1 -18.14,58 PC1.A10
  Bottom Layer w1: SN74.6 -33.38,62.38 -31.76,64 -17.86,64 PC1.A10
NetPC1_A11: PC1.A11 SN74.2 T3.1 | length 37.2
  Top Layer w1: SN74.2 -43.62,57.62 T3.1
  Bottom Layer w1: SN74.2 -41.754,60.514 -16.914,60.514 PC1.A11
NetR1_1: R1.1 Ustep?.1 Ustep?.11 | length 51.7
  Top Layer w1: v1(-78,26) -74.81,29.19 Ustep?.1 -74.81,31.675 -79.389,36.254 -79.389,46.575 -78.575,47.389 -78.161,47.389 -76.751,48.799 R1.1 -69.317,48.799 -67.907,47.389 -61.425,47.389 -60.036,46 v1(-60,46) -63.38,42.62 Ustep?.11
S2: PC2.2 Ustep?.2 | length 27.2
  Top Layer w1: v1(-76,26) -73.54,28.46 Ustep?.2
  Bottom Layer w1: PC2.2 -78.7,15.35 -77.466,16.584 -77.466,24.461 -76,25.927 v1(-76,26)
S3: PC2.4 Ustep?.3 | length 26.6
  Top Layer w1: v1(-74,26) -72.27,27.73 Ustep?.3
  Bottom Layer w1: PC2.4 -76.16,10.403 -76,10.563 -76,24 v1(-74,26)
S8: PC2.6 Ustep?.8 | length 30.1
  Top Layer w1: Ustep?.8 -65.92,27.92 v1(-64,26)
  Bottom Layer w1: PC2.6 -73.62,10.154 -74,10.534 -74,16 v1(-64,26)
S9: PC2.8 Ustep?.9 | length 29.9
  Top Layer w1: Ustep?.9 -64.65,28.65 v1(-62,26)
  Bottom Layer w1: PC2.8 -71.08,16.92 v1(-62,26)
S12: PC2.5 Ustep?.12 | length 64.5
  Top Layer w1: Ustep?.12 -64.634,41.016 -64.634,43.366 v1(-62,46)
  Bottom Layer w1: PC2.5 -73.773,3.73 -75.312,2.191 -79.797,2.191 -80.239,2.633 -80.239,15.585 -79.389,16.435 -79.389,28.611 v1(-62,46)
S13: PC2.7 Ustep?.13 | length 72.1
  Top Layer w1: Ustep?.13 -65.92,44.08 v1(-64,46)
  Bottom Layer w1: PC2.7 -71.08,1.92 -72.063,0.937 -80.937,0.937 -83.539,3.539 -83.539,26.461 v1(-64,46)
S18: PC2.1 Ustep?.18 | length 56
  Top Layer w1: v1(-86,11) -82.46,7.46 -82.43,7.46 PC2.1 ; v1(-74,46) -72.27,44.27 Ustep?.18
  Bottom Layer w1: v1(-86,11) -86,25.773 -74,37.773 v1(-74,46)
S19: PC2.3 Ustep?.19 | length 63.6
  Top Layer w1: v1(-89,11) -87,9 -80.191,2.191 -77.603,2.191 -76.16,3.634 PC2.3 ; v1(-76,46) -73.54,43.54 Ustep?.19
  Bottom Layer w1: v1(-89,11) -89,25 -76,38 v1(-76,46)
VCC: PC1.A24
pads on no net: PC1.A6 PC1.A7 PC1.A13 PC1.A25 PC1.B4 PC1.B5 PC1.B6 PC1.B7 PC1.B8 PC1.B9 PC1.B10 PC1.B11 PC1.B12 PC1.B13 PC1.B14 PC1.B15 PC1.B16 PC1.B17 PC1.B18 PC1.B19 PC1.B20 PC1.B21 PC1.B22 PC1.B23 PC1.B24 PC1.B25 PC1.B26 PC1.B27 PC1.B28 PC1.B29 PC1.B30 PC1.B31 PC1.B32 PC2.9 PC2.10 PC2.11 PC2.12 PC2.13 PC2.14 PC2.15 PC2.16 PC2.17 PC2.18 PC2.19 PC2.20 PC2.21 PC2.22 PC2.23 PC2.24 PC2.25 PC2.26 PC2.27 PC2.28 PC2.29 PC2.30 PC2.31 PC2.32 PC2.33 PC2.34 PC2.35 PC2.37 PC2.38 PC2.39 PC2.40 SN74.3 SN74.4 SN74.10 SN74.11
copper on no net:
  other v1: -35,26 -37,29 -33,29 -30,30

## Polygon pours and split planes (outlines as drawn)
GND on layer2 "GND_L02_P000" (solid, pour order 0): -88,1 -11,1 -11,86 -14,83 -88,83
GND on layer2 "GND_L02_P001" (solid, pour order 1): -87,83 -10,83 -10.117,83.117 -10.117,86.883 -86.883,86.883 -87,87
+5 on layer3 "+5_L03_P009" (solid, pour order 9): -27,3 -28,4 -28,10 -38,10 -44,11 -41,8
+5 on layer3 "+5_L03_P008" (solid, pour order 8): -27,3 -50.473,17.117 -81.883,17.117 -83.22,15.78
3.3V on layer3 "3.3V_L03_P006" (solid, pour order 6): -27,54 -11,70 -85,70 -84,69 -84,59
+5 on layer3 "+5_L03_P005" (solid, pour order 5): -85,20 -82,17 -9,17 -9,36 -27,54 -84,54
+5 on layer3 "+5_L03_P007" (solid, pour order 7): -84,54 -84,61 -81,58 -31,58 -27,54
+BAT on layer3 "+BAT_L03_P004" (solid, pour order 4): -62.849,29.849 -62.849,27.151 -63,27 -60,24 -57,24 -54,27
+BAT on layer3 "+BAT_L03_P003" (solid, pour order 3): -63,30 -60,27 -60,24 -53,17 -17,17 -13,21 -14,22 -19,22
3.3V on layer3 "3.3V_L03_P002" (solid, pour order 2): -85,70 -10,70 -9,71 -9,86 -85,86

## Silkscreen, mask and mechanical layers (free items; w line width, h text height)
Top Overlay:
  text "Jared Hochstenbach" at -85.746,85.254 h1.52
  text "Conestoga College" at -85.746,81.762 h1.52
  text "ESE Degree Program" at -85.746,77.762 h1.52

## Text inside footprints (layer, text, board x,y; h text height)
PC1: Top Overlay "B" at -13.118,87.332 h1.5 r270; Top Overlay "A" at -15.753,87.332 h1.5 r270
SN74: Top Overlay "*" at -49,62 h1.27 r90; Mechanical 13 "*" at -49,62 h1.27 r90